# Allegro board AVRUSB500.brd
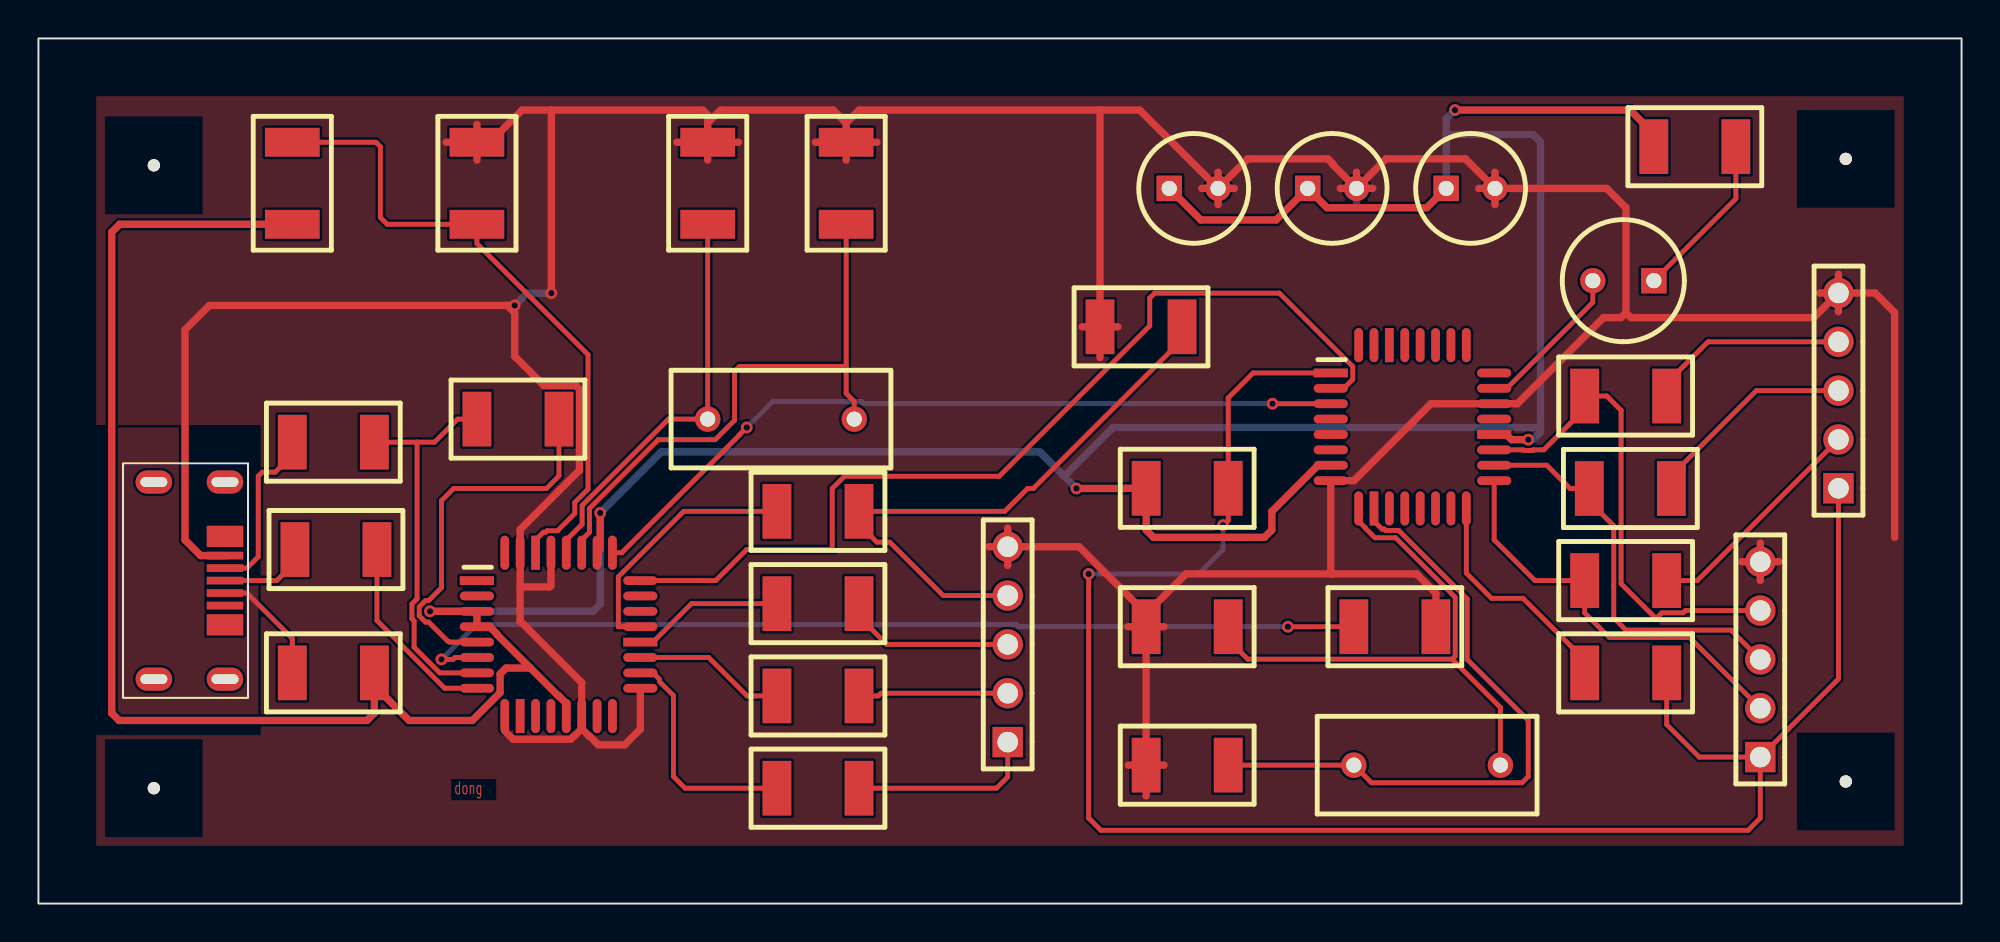
[diagram p0: board, top side]
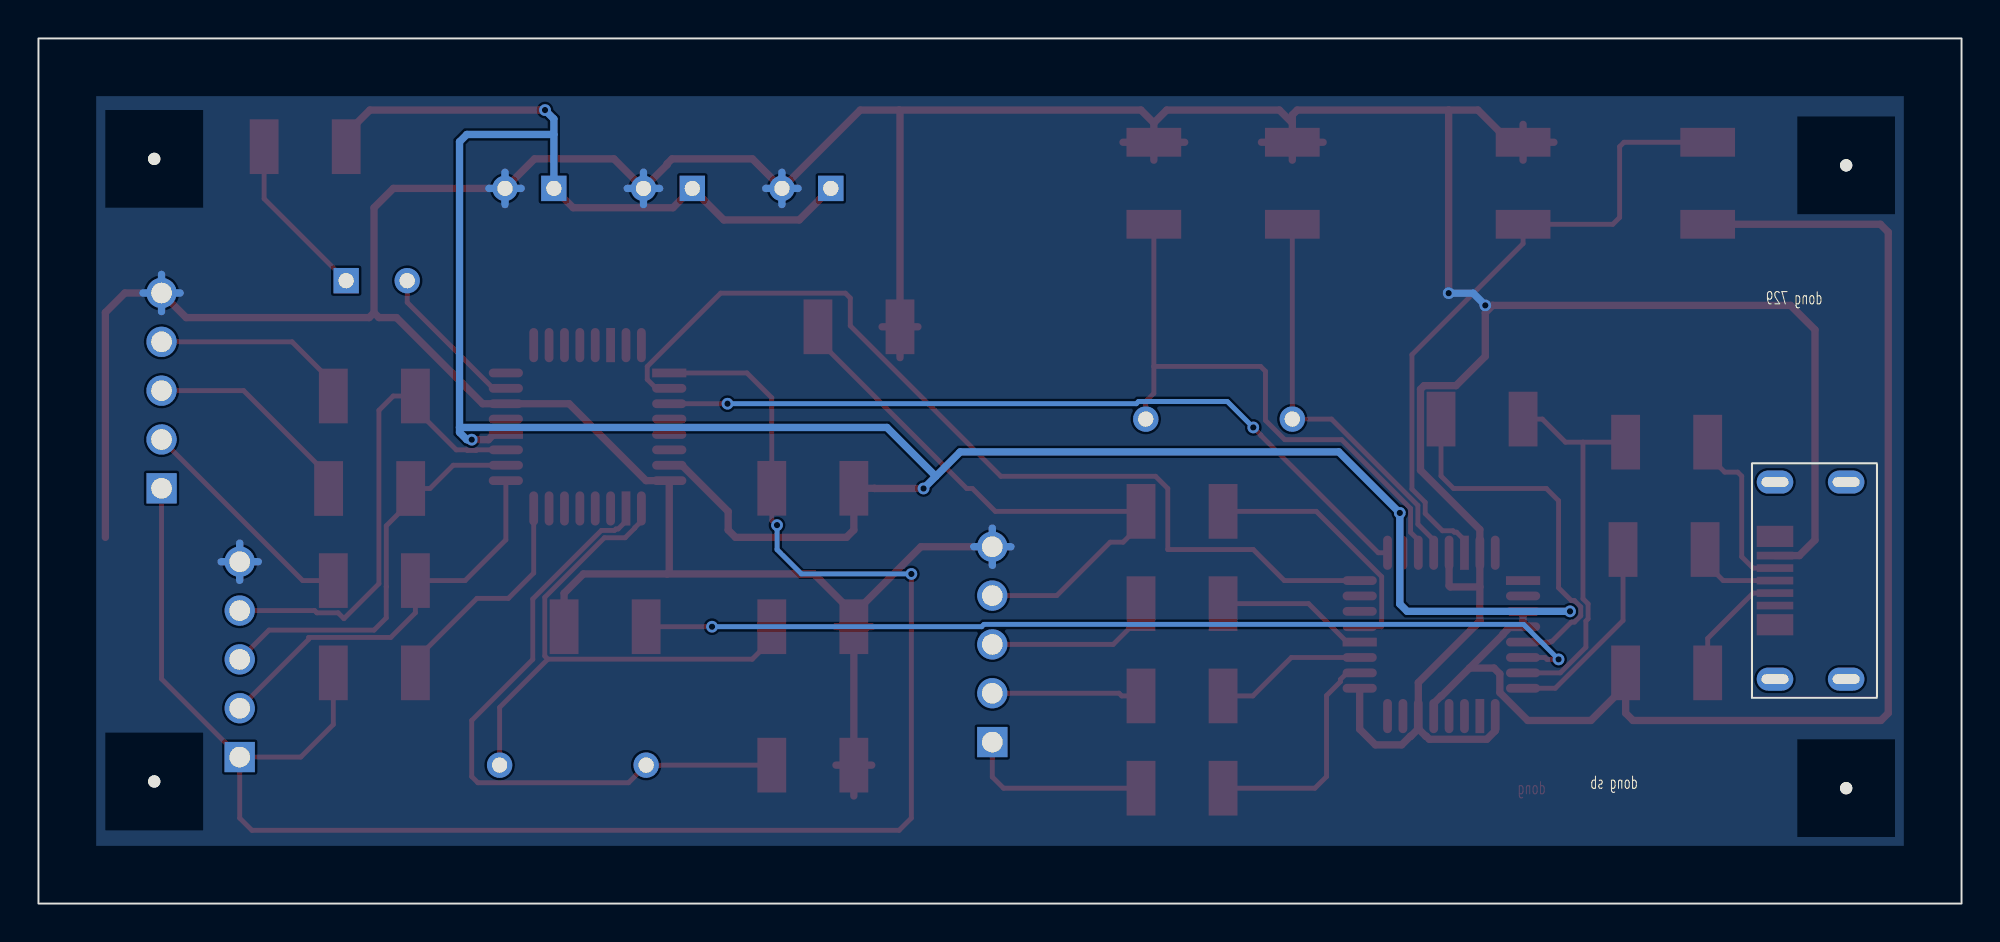
[diagram p1: board, bottom side, seen from below]

Outline 100 x 45 mm; copper layers: TOP, BOTTOM. Coordinates in mm from the lower left corner of the outline.
Outline path: rectangle 0,0 100,45

## Design rules (mm)
constraint set DEFAULT: min track width 0.254

## Placement (name value [footprint] x y rotation side)
C1  47nF  [SML2015]  22.8 39.6 270 top
C2  27pF  [SML2015]  34.8 39.6 270 top
C3  27pF  [SML2015]  42 39.6 270 top
C4  47nF  [SML2015]  68.4 14.4 0 top
C5  100nF  [CPCYL1D225LS100031]  66 37.2 0 top
C6  1uF  [CPCYL1D225LS100031]  58.8 37.2 0 top
C7  100nF  [SML2015]  57.6 14.4 0 top
C8  100nF  [SML2015]  57.6 7.2 0 top
C9  100nF  [CPCYL1D225LS100031]  73.2 37.2 0 top
C10  22nF  [SML2015]  55.2 30 0 top
D1  LED  [CYLD250LS125031]  84 32.4 180 top
IC1  ATmega8  [QUAD80M32WG900]  67.2 27.6 270 top
J1  bbpg_Bitbang  [BLKCON100VHTM1SQSW1005]  50.4 8.4 90 top
J2  USBA  [MICRO_USB]  6 16.8 270 top
J3  avrusb500_out  [BLKCON100VHTM1SQSW1005]  93.6 21.6 90 top
J4  firmware_in  [BLKCON100VHTM1SQSW1005]  89.53 7.62 90 top
NOREF  -  [unnamed]  6 38.4 0 top
NOREF#2  -  [unnamed]  93.98 38.73 0 top
NOREF#3  -  [#2]  100 0 90 top
NOREF#4  -  [unnamed]  6 6 0 top
NOREF#5  -  [unnamed]  93.98 6.35 0 top
NOREF#6  -  [#2]  0 45 0 top
R1  470  [SML2015]  13.2 39.6 270 top
R2  220  [SML2015]  38.4 20.4 0 top
R3  220  [SML2015]  38.4 15.6 0 top
R4  220  [SML2015]  38.4 10.8 0 top
R5  27  [SML2015]  13.34 18.41 0 top
R6  27  [SML2015]  13.2 24 0 top
R7  1.5k  [SML2015]  22.8 25.2 0 top
R8  2.2  [SML2015]  13.2 12 0 top
R9  10k  [SML2015]  57.6 21.6 0 top
R10  470  [SML2015]  88.27 39.37 180 top
R11  1k  [SML2015]  80.4 26.4 0 top
R12  220  [SML2015]  80.64 21.59 0 top
R13  1k  [SML2015]  80.4 16.8 0 top
R14  220  [SML2015]  38.4 6 0 top
R15  220  [SML2015]  80.4 12 0 top
U1  FT232BM  [QUAD80M32WG900]  22.8 16.8 270 top
Y1  3.6864Mhz  [RAD450X200LS300031]  68.4 7.2 0 top
Y2  6Mhz  [RAD450X200LS300031]  34.8 25.2 0 top

## Library data of the parts
C1-C4 C7 C8 C10 = CAPACITOR NON-POL: alternate symbols: (SML2015)
C5 C9 = CAPACITOR NON-POL: alternate symbols: (SMDCAP)
C6 = CAPACITOR POL: alternate symbols: (SMDCAP)
D1 = LED
IC1 = ATmega8-DIL28_1
J1 J3 J4 = CON5
J2 = CON4_7
R1-R15 = R: alternate symbols: (SML2015)
U1 = FT232BM_2: alternate symbols: (JEDECMS026)
Y1 Y2 = ZTA

## Footprints (pads in the part's own frame, mm; a bottom-side part is the same pattern mirrored in y, then rotated)
BLKCON100VHTM1SQSW1005
  rect 1.575x1.575 hole 1.067: 1(0,0)
  round 1.575 hole 1.067: 2(2.54,0) 3(5.08,0) 4(7.62,0) 5(10.16,0)
CPCYL1D225LS100031
  rect 1.321x1.321 hole 0.787: 1(0,0)
  round 1.321 hole 0.787: 2(2.54,0)
CYLD250LS125031
  rect 1.321x1.321 hole 0.787: 1(0,0)
  round 1.321 hole 0.787: 2(3.175,0)
MICRO_USB
  oval 1.2x1.9 hole 0.5x1.4: (-5.125,3.7) (-5.125,0) (5.125,3.7) (5.125,0)
  rect 1.1x1.9 smd: (-2.3,3.7) (2.3,3.7)
  rect 0.4x1.9 smd: 1(-1.3,3.7) 2(-0.65,3.7) 3(0,3.7) 4(0.65,3.7) 5(1.3,3.7)
QUAD80M32WG900
  rect 0.457x1.778 smd: 1(0,0) 20(3.2,8.496)
  oval 0.457x1.778 smd: 2(0.8,0) 3(1.6,0) 4(2.4,0) 5(3.2,0) 6(4,0) 7(4.801,0) 8(5.601,0) 17(5.601,8.496) 18(4.801,8.496) 19(4,8.496) 21(2.4,8.496) 22(1.6,8.496) 23(0.8,8.496) 24(0,8.496)
  oval 1.778x0.457 smd: 9(7.048,1.448) 11(7.048,3.048) 12(7.048,3.848) 13(7.048,4.648) 14(7.048,5.448) 15(7.048,6.248) 16(7.048,7.048) 25(-1.448,7.048) 26(-1.448,6.248) 27(-1.448,5.448) 28(-1.448,4.648) 29(-1.448,3.848) 31(-1.448,2.248) 32(-1.448,1.448)
  rect 1.778x0.457 smd: 10(7.048,2.248) 30(-1.448,3.048)
RAD450X200LS300031
  round 1.321 hole 0.787: 1(0,0) 2(7.62,0)
SML2015
  rect 1.499x2.845 smd: 1(0,0) 2(4.267,0)
unnamed
  round 0.635 hole 3.175 unplated: (0,0)

## Nets
+5V: J2.4 R8.1
GND: C1.1 C2.1 C3.1 C4.2 C5.2 C6.2 C7.1 C8.1 C9.2 C10.1 IC1.8 IC1.22 J1.5 J2.1 J3.5 J4.5 U1.9 U1.14 U1.17 U1.29 U1.31
VCC: C5.1 C6.1 C9.1 IC1.7(VCC) IC1.20 R1.2 R8.2 R9.1 R10.2 U1.3 U1.4 U1.13 U1.26
BMISO: J1.3 R3.2
BMOSI: J1.2 R4.2
BRESET: J1.1 R14.2
BSCK: C10.2 J1.4 R2.2
D+: J2.2 R6.1
D-: J2.3 R5.1
F_MISO: IC1.18 J4.3 R12.1
F_MOSI: IC1.17 J4.2 R13.1
F_SCK: IC1.19 J4.4 R11.1
MISO: J3.3 R12.2
MOSI: J3.2 R13.2
RESET: IC1.1 J3.1 J4.1 R9.2 R15.2
RXD: IC1.2 U1.24
SCK: J3.4 R11.2
TXD: IC1.3 U1.25
N02483: R6.2 R7.1 U1.7
N02615: R5.2 U1.8
N03527: C4.1 U1.6
N06839: R2.1 U1.21
N06967: R3.1 U1.20
N07033: R4.1 U1.19
N07247: R14.1 U1.18
N11951: R7.2 U1.5
N15182: C7.2 IC1.9 Y1.2
N15289: C8.2 IC1.10 Y1.1
N19734: D1.2(CATHODE) IC1.23
N20572: D1.1 R10.1
N22544: IC1.16 R15.1
N41098: C3.2 U1.27 Y2.2
N41106: C2.2 U1.28(XTOUT) Y2.1
N49165: C1.2 R1.1 U1.30

Pads without a net: IC1 4 5 6 11 12 13 14 15 21 24 25 26 27 28 29 30 31 32; J2 5; U1 1 2 10 11 12 15 16 22 23 32

## Via types
v1: diameter 0.61, hole 0.33, TOP to BOTTOM, 13 vias

## Routing (per net, layer and track width the routed paths; a pad name or vN(x,y) marks a point on that pad's centre or on a via; arc(x,y) is an arc through that point)
+5V: length 6.3
  TOP w0.254: J2.4 10.84,16.15 13.2,13.79 R8.1
GND: length 315
  TOP w0.381: 82.55,30.73 82.55,36.2 81.55,37.2 C9.2 ; 82.55,30.73 82.3,30.48 81.38,30.48 76.9,26 IC1.22 72.41,26 68.41,22 IC1.8 67.2,17.25 67.31,17.14 ; 82.55,30.73 82.8,30.48 92.32,30.48 J3.5 ; 25.05,16.47 25.05,14.69 28.25,11.49 U1.14 28.25,9.09 ; 25.05,16.47 U1.31 25.05,19.45 28.13,22.54 28.13,26.75 27.95,26.94 26.29,26.94 24.77,28.46 24.77,30.73 24.38,31.11 ; 25.05,16.47 26.59,16.47 26.65,16.53 U1.29 ; 50.4,17.59 J1.5 ; J1.5 50.4,19.53 ; J1.5 49.43,18.56 ; J1.5 54.11,18.56 57.6,15.07 ; 56.67,14.4 C7.1 ; C7.1 57.6,15.07 ; C7.1 C8.1 ; C7.1 58.53,14.4 ; 89.53,16.81 J4.5 ; J4.5 89.53,18.75 ; J4.5 90.5,17.78 ; J4.5 88.57,17.78 ; J3.5 93.6,32.73 ; J3.5 93.6,30.79 ; J3.5 92.63,31.76 ; J3.5 95.5,31.76 96.52,30.74 96.52,19.05 ; 75.74,36.36 C9.2 ; C9.2 74.9,37.2 ; C9.2 75.74,38.04 ; C9.2 74.2,38.73 70.08,38.73 C5.2 ; 67.7,37.2 C5.2 ; C5.2 69.38,37.2 ; C5.2 68.54,38.04 ; C5.2 67.31,38.43 67.31,38.48 67.06,38.73 62.88,38.73 C6.2 ; 61.34,36.36 C6.2 ; C6.2 62.18,37.2 ; C6.2 60.5,37.2 ; C6.2 61.34,38.04 ; C6.2 57.27,41.27 55.24,41.27 ; 22.8,38.67 C1.1 ; C1.1 22.8,40.53 ; C1.1 21.2,39.6 ; C1.1 23.47,39.6 25.15,41.27 26.67,41.27 ; 54.27,30 C10.1 ; C10.1 56.13,30 ; C10.1 55.2,41.23 55.24,41.27 ; C10.1 55.2,28.4 ; 57.6,15.07 59.67,17.14 67.31,17.14 ; 26.67,41.27 34.55,41.27 34.8,41.02 34.8,40.6 ; 26.67,41.27 v1(26.67,31.75) ; 67.31,17.14 71.66,17.14 72.67,16.14 C4.2 ; 28.25,9.09 27.86,8.71 27.83,8.71 27.67,8.54 24.69,8.54 24.25,8.98 U1.9 ; 28.25,9.09 28.64,8.71 28.66,8.71 29.11,8.26 30.48,8.26 31.3,9.07 U1.17 ; 55.24,41.27 42.67,41.27 42,40.6 ; C2.1 34.8,40.6 ; C2.1 33.2,39.6 ; C2.1 36.4,39.6 ; C2.1 34.8,38.67 ; 34.8,40.6 35.47,41.27 41.33,41.27 42,40.6 ; 57.6,5.6 C8.1 ; C8.1 58.53,7.2 ; C8.1 56.67,7.2 ; 24.38,31.11 v1(24.77,31.11) ; 24.38,31.11 8.89,31.11 7.62,29.84 7.62,18.91 8.43,18.1 J2.1 ; 42,40.6 C3.1 ; 40.4,39.6 C3.1 ; C3.1 43.6,39.6 ; C3.1 42,38.67
  BOTTOM w0.381: C6.2 62.18,37.2 ; C6.2 60.5,37.2 ; C6.2 61.34,36.36 ; C6.2 61.34,38.04 ; C5.2 68.54,38.04 ; C5.2 68.54,36.36 ; C5.2 69.38,37.2 ; C5.2 67.7,37.2 ; J3.5 94.57,31.76 ; J3.5 93.6,30.79 ; J3.5 92.63,31.76 ; J3.5 93.6,32.73 ; v1(26.67,31.75) 25.4,31.75 v1(24.77,31.11) ; 49.43,18.56 J1.5 ; J1.5 51.37,18.56 ; J1.5 50.4,17.59 ; J1.5 50.4,19.53 ; 74.9,37.2 C9.2 ; C9.2 76.58,37.2 ; C9.2 75.74,38.04 ; C9.2 75.74,36.36 ; 88.57,17.78 J4.5 ; J4.5 89.53,16.81 ; J4.5 89.53,18.75 ; J4.5 90.5,17.78
VCC: length 212.9
  TOP w0.381: R10.2 84,40.04 82.77,41.27 v1(73.66,41.27) ; U1.26 29.21,18.41 v1(29.21,20.32) ; 25.58,12.25 23.85,13.99 23.85,14.01 23.46,14.4 U1.4 U1.3 v1(20.36,15.2) ; 25.58,12.25 24.31,12.25 24.01,11.94 24.01,10.97 22.56,9.53 19.27,9.53 17.47,11.33 ; 25.58,12.25 27.03,10.8 27.06,10.8 27.45,10.41 U1.13 ; 17.47,11.33 R8.2 ; 17.47,11.33 17.47,9.91 17.09,9.53 4.19,9.53 3.81,9.91 3.81,34.92 4.22,35.33 R1.2 ; C9.1 72.19,36.2 67,36.2 C5.1 64.36,35.56 60.44,35.56 C6.1 ; v1(77.47,24.13) 76.6,24.13 76.33,24.4 IC1.20 ; v1(53.98,21.59) 56.52,21.59 56.53,21.6 R9.1 57.6,19.43 57.98,19.05 63.75,19.05 64.14,19.43 64.14,20.39 66.54,22.8 IC1.7
  BOTTOM w0.381: 73.2,40.01 73.2,40.81 v1(73.66,41.27) ; 73.2,40.01 C9.1 ; 73.2,40.01 77.72,40.01 78.11,39.62 78.11,24.77 ; 78.11,24.77 78.11,24.51 77.72,24.13 v1(77.47,24.13) ; 78.11,24.77 55.88,24.77 53.34,22.23 ; 53.34,22.23 v1(53.98,21.59) ; 53.34,22.23 52.07,23.5 32.38,23.5 v1(29.21,20.32) 29.21,15.58 28.83,15.2 v1(20.36,15.2)
BMISO: length 9
  TOP w0.254: J1.3 44.11,13.48 42.67,14.93 R3.2
BMOSI: length 7.8
  TOP w0.254: J1.2 43.81,10.94 43.67,10.8 R4.2
BRESET: length 9.8
  TOP w0.254: R14.2 49.81,6 50.4,6.58 J1.1
BSCK: length 31.1
  TOP w0.254: C10.2 59.47,29.33 51.73,21.59 51.44,21.59 50.24,20.4 R2.2 42.67,19.73 43.6,18.8 44.27,18.8 47.05,16.02 J1.4
D+: length 9.5
  TOP w0.254: 13.34,24.25 13.34,24 R6.1 13.2,23.33 12.31,22.44 11.64,22.44 11.43,22.23 11.43,18.04 10.84,17.45 J2.2
D-: length 4.7
  TOP w0.254: J2.3 12.39,16.8 13.34,17.74 R5.1
F_MISO: length 21.2
  TOP w0.254: IC1.18 78.43,22.8 79.64,21.59 R12.1 80.64,20.92 81.91,19.65 81.91,16.48 81.92,16.48 81.92,14.86 82.55,14.22 88.01,14.22 J4.3
F_MOSI: length 21.6
  TOP w0.254: IC1.17 75.7,18.92 77.81,16.8 R13.1 80.4,15.12 81.68,13.84 85.95,13.84 85.95,13.75 J4.2
F_SCK: length 25.7
  TOP w0.254: J4.4 85.64,15.24 85.52,15.12 84.42,15.12 84.11,14.82 82.3,16.64 82.3,25.65 81.55,26.4 R11.1 80.4,25.73 78.27,23.6 77.73,23.6 77.7,23.57 77.24,23.57 77.21,23.6 IC1.19
MISO: length 11.2
  TOP w0.254: R12.2 84.91,22.26 89.33,26.68 J3.3
MOSI: length 12
  TOP w0.254: J3.2 86.26,16.8 R13.2
RESET: length 96.7
  TOP w0.254: J3.1 93.6,11.69 J4.1 ; R15.2 84.67,9.31 86.36,7.62 J4.1 ; v1(54.61,17.14) 54.61,4.45 55.24,3.81 88.9,3.81 89.53,4.45 J4.1 ; v1(61.59,19.68) 61.63,19.68 61.87,19.92 R9.2 61.87,26.31 63.16,27.6 IC1.1
  BOTTOM w0.254: v1(61.59,19.68) 61.59,18.41 60.33,17.14 v1(54.61,17.14)
RXD: length 49.5
  TOP w0.254: U1.24 35.22,16.8 36.83,18.41 41.27,18.41 41.27,21.59 41.91,22.23 49.96,22.23 57.78,30.05 57.78,31.5 58.04,31.75 64.53,31.75 68.34,27.93 68.34,27.27 67.88,26.8 IC1.2
SCK: length 10.5
  TOP w0.254: R11.2 84.67,27.07 86.81,29.22 J3.4
TXD: length 40.7
  TOP w0.254: IC1.3 v1(64.17,26) ; v1(36.83,24.77) 36.43,24.37 36.43,24.35 30.33,18.25 U1.25
  BOTTOM w0.254: v1(36.83,24.77) 38.18,26.11 42.8,26.11 42.91,26 v1(64.17,26)
N02483: length 20.5
  TOP w0.254: 19.68,24 20.6,24 21.8,25.2 R7.1 ; 19.68,24 19.68,15.86 19.42,15.59 19.42,14.81 19.53,14.7 19.53,13.33 20.86,12 U1.7 ; 19.68,24 R6.2
N02615: length 10.3
  TOP w0.254: R5.2 17.6,14.72 21.13,11.2 U1.8
N03527: length 50.1
  TOP w0.254: U1.6 21.66,12.8 21.56,12.7 v1(20.95,12.7) ; C4.1 v1(64.97,14.4)
  BOTTOM w0.254: v1(20.95,12.7) 22.78,14.52 50.83,14.52 50.95,14.4 v1(64.97,14.4)
N06839: length 13.4
  TOP w0.254: R2.1 33.55,20.4 30.15,17 30.15,14.4 U1.21
N06967: length 7.9
  TOP w0.254: U1.20 31.96,13.6 33.96,15.6 R3.1
N07033: length 7.9
  TOP w0.254: U1.19 34.85,12.8 36.85,10.8 R4.1
N07247: length 12.1
  TOP w0.254: U1.18 31.96,12 32.3,11.66 32.3,11.54 33.02,10.82 33.02,6.6 33.62,6 R14.1
N11951: length 19.7
  TOP w0.254: R7.2 27.07,22.24 26.42,21.59 21.59,21.59 20.95,20.95 20.95,16.43 20.29,15.76 20.13,15.76 19.8,15.43 19.8,14.97 20.13,14.64 20.29,14.64 21.29,13.64 21.34,13.64 21.39,13.6 U1.5
N15182: length 29.9
  TOP w0.254: 73.51,12.71 76.02,10.2 Y1.2 ; 73.51,12.71 73.67,12.87 73.67,15.93 70.57,19.03 69.49,19.03 68.99,19.53 68.99,19.55 68.65,19.89 IC1.9 ; 73.51,12.71 62.88,12.71 61.87,13.73 C7.2
N15289: length 33.9
  TOP w0.254: C8.2 Y1.1 69.31,6.29 77.15,6.29 77.47,6.6 77.47,9.53 74.3,12.7 74.3,15.84 70.73,19.41 70.05,19.41 69.97,19.48 69.86,19.48 69.45,19.89 IC1.10
N19734: length 8.1
  TOP w0.254: IC1.23 76.36,26.8 80.83,31.27 D1.2
N20572: length 8.7
  TOP w0.254: D1.1 88.27,36.66 R10.1
N22544: length 12.1
  TOP w0.254: R15.1 80.4,12.67 77.2,15.88 75.56,15.88 74.25,17.19 IC1.16
N41098: length 30.7
  TOP w0.254: U1.27 28.25,18.91 28.65,19.31 28.65,20.55 32.23,24.13 35.19,24.13 36.2,25.13 36.2,27.69 36.45,27.94 42,27.94 ; Y2.2 42.42,26.12 42,26.54 42,27.94 ; 42,27.94 C3.2
N41106: length 21.3
  TOP w0.254: U1.28 27.45,18.91 28.27,19.73 28.27,20.71 32.76,25.2 Y2.1 C2.2
N49165: length 34.5
  TOP w0.254: U1.30 25.85,18.91 26.26,19.32 26.37,19.32 26.45,19.39 26.99,19.39 27.89,20.29 27.89,20.87 28.58,21.56 28.58,28.55 22.8,34.33 C1.2 18.13,35.33 17.78,35.69 17.78,39.37 17.55,39.6 R1.1

## Copper pours and planes (outline as drawn; the poured copper is in the pictures)
+5V on TOP: 3,8.89 3,24.77 11.43,24.77 11.43,8.89 ; 2 cut-outs
GND on TOP: 3,3 3,42 97,42 97,3 ; 14 cut-outs
GND on BOTTOM: 3,3 3,42 97,42 97,3

## Text on the board
Ref Des/Silkscreen Bottom: dong 729 | dong sb
TOP: dong
DIMENSION: FIGURE | FINISHED_SIZE | 0.33 | 0.787 | 1.067 | 3.175 | 1.4x0.5 | DRILL CHART: TOP to BOTTOM | ALL UNITS ARE IN MILLIMETERS | PLATED | NON-PLATED | QTY | 13 | 12 | 15 | 4
